# EAGLE board ESC2 (EAGLE 9.6.2)
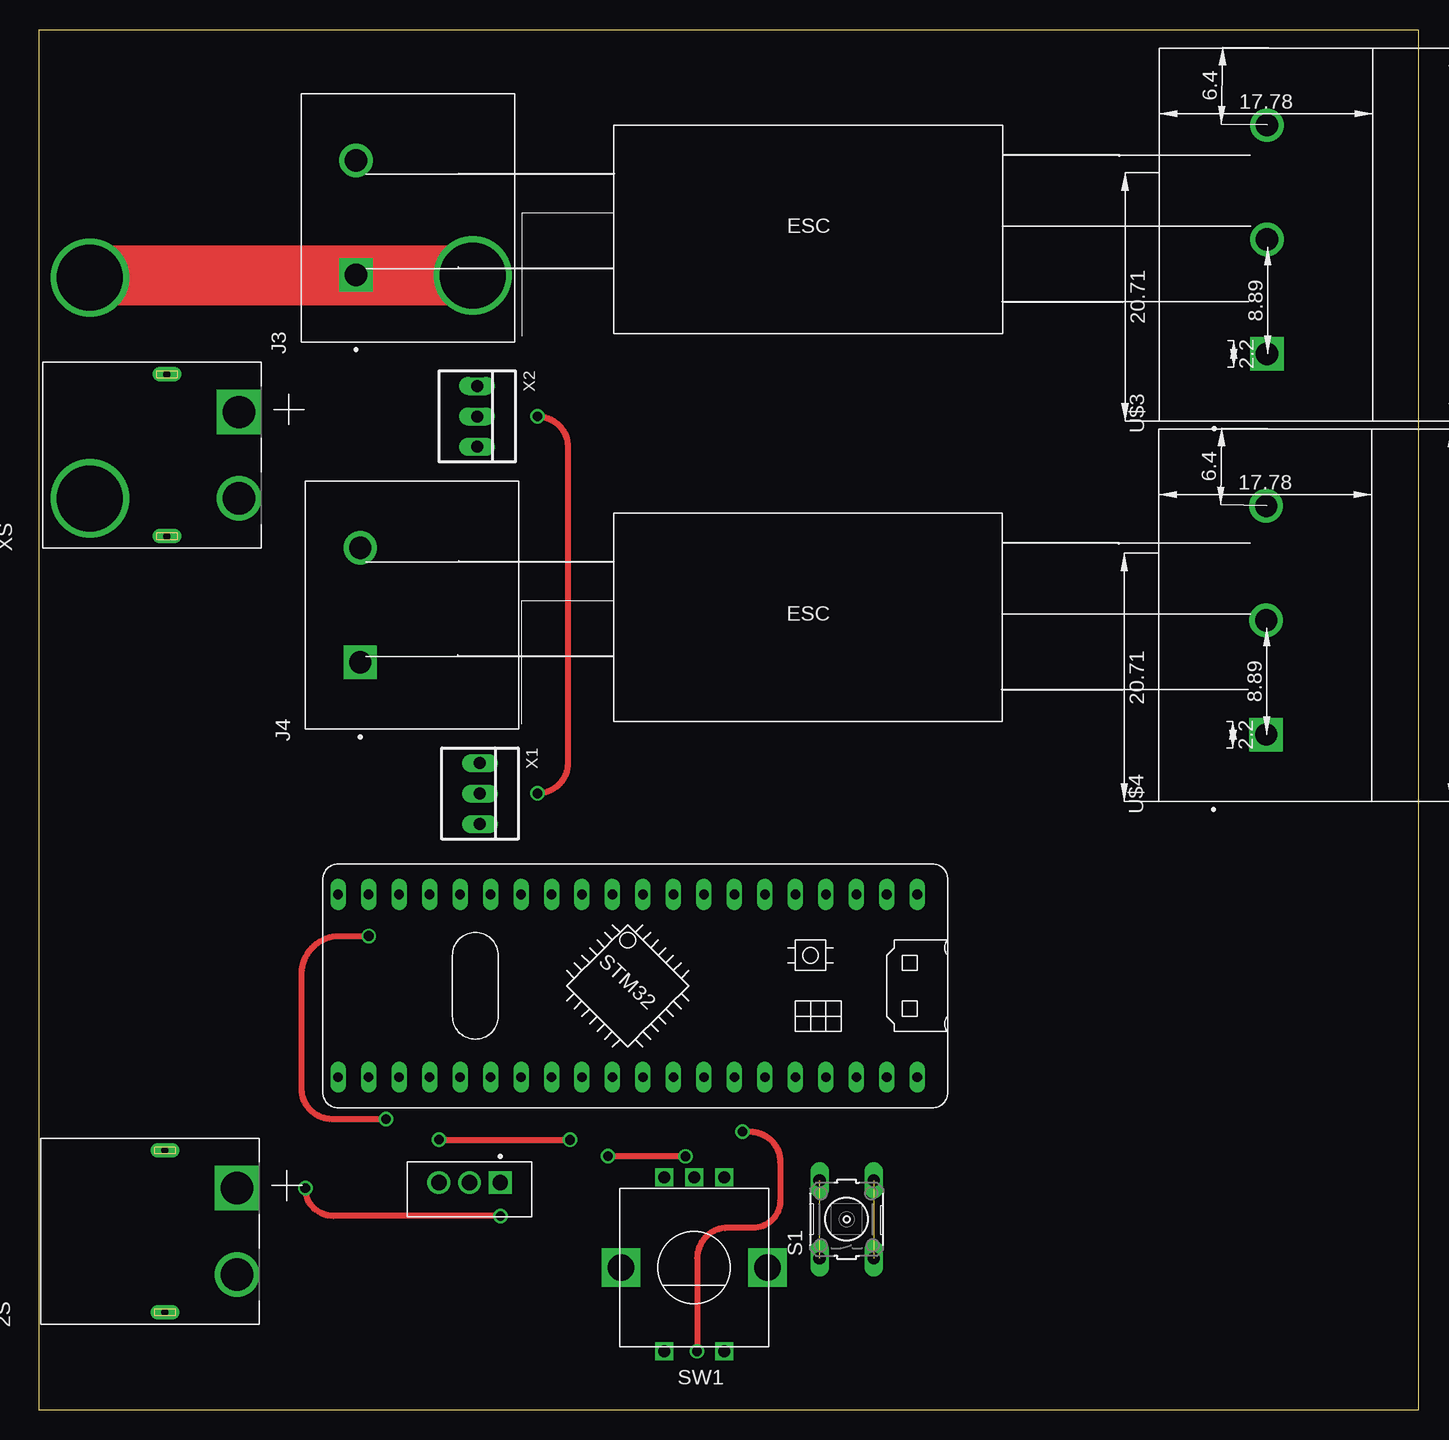
[diagram p0: board, top side]
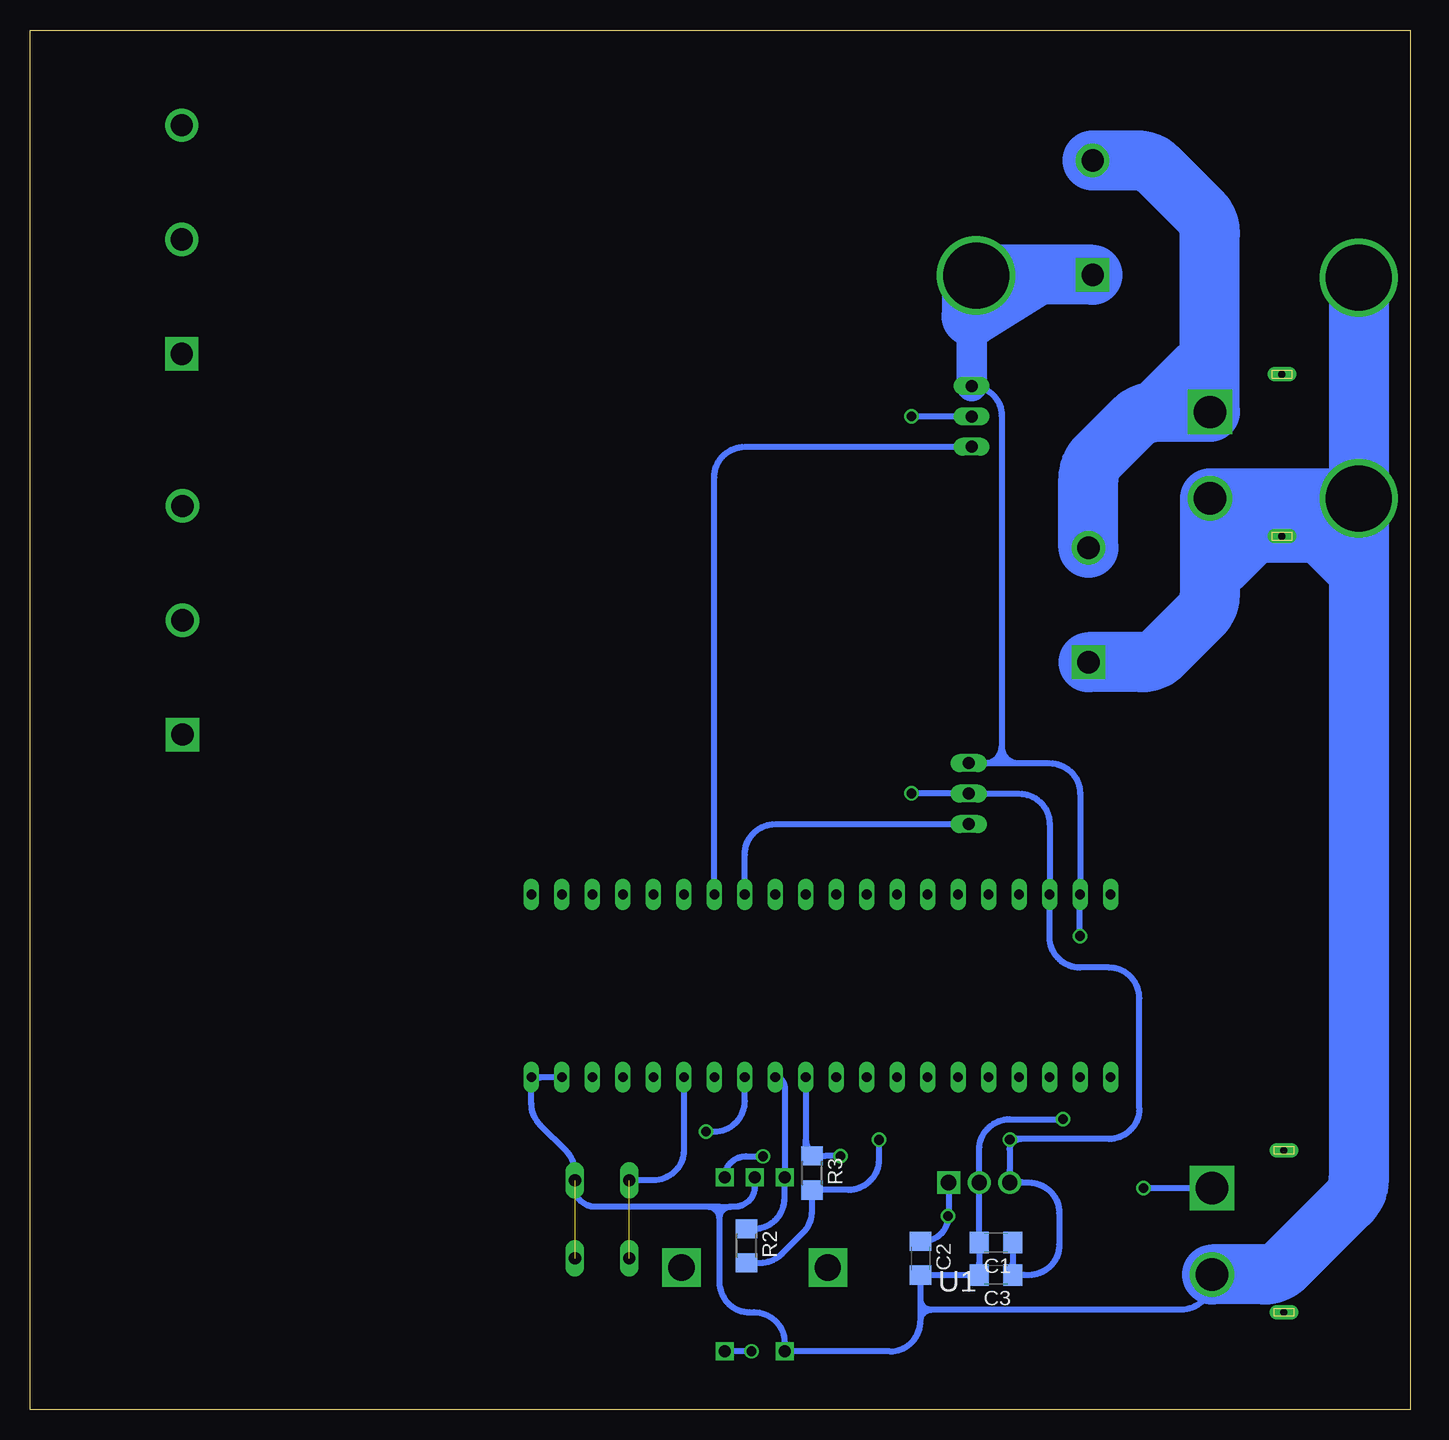
[diagram p1: board, bottom side, seen from below]

Size 115 x 115 mm. Coordinates in mm from the lower left corner, seen from the top.
Outline: 0,0 115,0 115,115 0,115 0,0
Copper layers (1*16): Top 0.035mm / dielectric 1.5mm / Bottom 0.035mm
Design rules "default": minimum track width 6mil, minimum drill 0.35mm, track to track 6mil, track to pad 6mil, pad to pad 6mil, via to via 6mil, smd to smd 6mil, copper to edge 40mil, drill to drill 6mil, minimum pad ring 10mil, minimum via ring 8mil, stop-mask expansion 4mil, vias tented up to drill 0mil, thermal gap 10mil

## Footprints (pad centres in the part's own frame; a part is rotated, then mirrored left to right if it is on the bottom)
AMASS_XT60PW-M = drill 2.7 square: 1 3.6,-6 | drill 2.7: 2 -3.6,-6 | drill 0.6 pad 1.2 long: S1 6.75,0; S2 -6.75,0
C1206 = smd 1.6 x 1.8: 1 -1.4,0; 2 1.4,0
TE_4-1437652-6 = drill 1.854 pad 2.204 square: 1 0,0 | drill 1.854 pad 2.204: 2 9.53,0
BLUE_PILL = drill 0.8 long: P$1 -7.62,15.24; P$2 -7.62,12.7; P$3 -7.62,10.16; P$4 -7.62,7.62; P$5 -7.62,5.08; P$6 -7.62,2.54; P$7 -7.62,0; P$8 -7.62,-2.54; P$9 -7.62,-5.08; P$10 -7.62,-7.62; P$11 -7.62,-10.16; P$12 -7.62,-12.7; P$13 -7.62,-15.24; P$14 -7.62,-17.78; P$15 -7.62,-20.32; P$16 -7.62,-22.86; P$17 -7.62,-25.4; P$18 -7.62,-27.94; P$19 -7.62,-30.48; P$20 -7.62,-33.02; P$21 7.62,15.24; P$22 7.62,12.7; P$23 7.62,10.16; P$24 7.62,7.62; P$25 7.62,5.08; P$26 7.62,2.54; P$27 7.62,0; P$28 7.62,-2.54; P$29 7.62,-5.08; P$30 7.62,-7.62; P$31 7.62,-10.16; P$32 7.62,-12.7; P$33 7.62,-15.24; P$34 7.62,-17.78; P$35 7.62,-20.32; P$36 7.62,-22.86; P$37 7.62,-25.4; P$38 7.62,-27.94; P$39 7.62,-30.48; P$40 7.62,-33.02
R1206 = smd 1.6 x 1.803: 1 -1.422,0; 2 1.422,0
B3F-10XX = drill 1.016 long: 1 -3.251,2.261; 2 3.251,2.261; 3 -3.251,-2.261; 4 3.251,-2.261
ALPS_EC12E_SW = drill 1 square: A -2.5,-7.5; B 2.5,-7.5; C 0,-7.5; D -2.5,7; E 2.5,7 | drill 2.2 square: GND1 -6.1,0; GND2 6.1,0
TO255P1040X460X1968-3 = drill 1.27 pad 1.91 square: 1 0,0 | drill 1.27 pad 1.91: 2 2.55,0; 3 5.1,0
3-PIN-TB = drill 1.854 pad 2.204: 2 9.53,5.138; 3 19.06,5.138 | drill 1.854 pad 2.204 square: P$2 0,5.138
22-23-2031 = drill 1 long: 1 -2.54,0; 2 0,0; 3 2.54,0

## Placement (x,y rotation side)
2S  XT60PW-M  [AMASS_XT60PW-M]  10.51,14.86 90 top
C1  [C1206]  34.49,13.9 180 bottom
C2  [C1206]  40.8,12.61 270 bottom
C3  [C1206]  34.51,11.21 180 bottom
J3  4-1437652-6  [TE_4-1437652-6]  26.45,94.58 90 top
J4  4-1437652-6  [TE_4-1437652-6]  26.79,62.3 90 top
MOD1  [BLUE_PILL]  57.97,35.32 270 top
R2  [R1206]  55.28,13.65 270 bottom
R3  [R1206]  49.83,19.72 270 bottom
S1  [B3F-10XX]  67.33,15.86 90 top
SW1  EC12E_SW  [ALPS_EC12E_SW]  54.62,11.84 180 top
U1  L7805CV  [TO255P1040X460X1968-3]  38.45,18.92 180 top
U$1  ESC_LIB  [ESC]  47.9,57.35 0 top
U$2  ESC_LIB  [ESC]  47.93,89.67 0 top
U$3  3-PIN-TB  [3-PIN-TB]  107.5,88 90 top
U$4  3-PIN-TB  [3-PIN-TB]  107.42,56.26 90 top
X1  22-23-2031  [22-23-2031]  36.77,51.34 270 top
X2  22-23-2031  [22-23-2031]  36.54,82.79 270 top
XS  XT60PW-M  [AMASS_XT60PW-M]  10.68,79.55 90 top

## Library data of the parts
2S XS = XT60PW-M; AVAILABILITY: Not in stock; CHECK_PRICES: https://www.snapeda.com/parts/XT60PW-M/AMASS/view-part/?ref=eda; DESCRIPTION: Socket, DC supply, male, PIN: 2; MF: AMASS; MP: XT60PW-M; PACKAGE: Package; PRICE: None; SNAPEDA_LINK: https://www.snapeda.com/parts/XT60PW-M/AMASS/view-part/?ref=snap
C1-C3 = rcl; SPICEPREFIX: C
J3 J4 = Terminal-Block-4-1437652-6; AVAILABILITY: In Stock; CHECK_PRICES: https://www.snapeda.com/parts/4-1437652-6/TE+Connectivity+%252F+AMP/view-part/?ref=eda; COMMENT: 4-1437652-6; DESCRIPTION: Conn Terminal Block 2 POS 9.53mm Solder ST Thru-Hole 25A/Contact; EU_ROHS_COMPLIANCE: Compliant; MF: TE Connectivity / AMP; MP: 4-1437652-6; PACKAGE: None; PRICE: None; PURCHASE-URL: https://www.snapeda.com/api/url_track_click_mouser/?unipart_id=2382815&manufacturer=TE Connectivity / AMP&part_name=4-1437652-6&search_term=terminal block 9.53mm; SNAPEDA_LINK: https://www.snapeda.com/parts/4-1437652-6/TE+Connectivity+%252F+AMP/view-part/?ref=snap
MOD1 = BluePill
R2 R3 = rcl; SPICEPREFIX: R
S1 = switch-omron; MPN: B3F-1000; OC_FARNELL: 176432; OC_NEWARK: 36M3542
SW1 = switch-alps; MPN: EC12E2424407; OC_FARNELL: 1520813; OC_NEWARK: 74M1068
U1 = L7805CV; AVAILABILITY: In Stock; CHECK_PRICES: https://www.snapeda.com/parts/L7805CV/STMicroelectronics/view-part/?ref=eda; DESCRIPTION: Linear Voltage Regulator IC Positive Fixed 1 Output 1.5A TO-220; MF: STMicroelectronics; MP: L7805CV; PACKAGE: TO-220-3 STMicroelectronics; PRICE: None; PURCHASE-URL: https://www.snapeda.com/api/url_track_click_mouser/?unipart_id=501150&manufacturer=STMicroelectronics&part_name=L7805CV&search_term=l7805; SNAPEDA_LINK: https://www.snapeda.com/parts/L7805CV/STMicroelectronics/view-part/?ref=snap
U$1 U$2 = ESC
U$3 U$4 = Terminal-Block-4-1437652-6
X1 X2 = con-molex; MF: MOLEX; MPN: 22-23-2031; OC_FARNELL: 1462950; OC_NEWARK: 30C0862

## Nets
2S: 2S.1 C2.1 U1.1
5V: C1.1 C3.1 MOD1.P$18 R2.2 R3.2 U1.3 X1.2 X2.2
BUTTON_RESET_PWM: MOD1.P$26 S1.1 S1.2
ENCODER_CLK&R: MOD1.P$30 R3.1 SW1.A
ENCODER_DT&R: MOD1.P$29 R2.1 SW1.B
ENCODER_RESET: MOD1.P$28 SW1.D
GND: 2S.2 C1.2 C2.2 C3.2 J3.1 J4.1 MOD1.P$19 MOD1.P$21 MOD1.P$22 S1.3 S1.4 SW1.C SW1.E U1.2 X1.1 X2.1 XS.2
PWM_MT_1: MOD1.P$8 X1.3
PWM_MT_2: MOD1.P$7 X2.3
XS: J3.2 J4.2 XS.1

## Tracks (layer width: path | path; a pad name or v marks a point on that pad's centre or on a via)
2S  (via drill 0.8)
  Top 0.508: v38.48,16.14 24.55,16.14 arc-90 v22.21,18.47
  Bottom 0.508: U1.1 38.45,16.17 arc90 v38.48,16.14 arc90 40.61,14.01 C2.1 | v22.21,18.47 16.53,18.47 arc90 2S.1
5V  (via drill 0.8)
  Top 0.508: v41.55,82.79 arc-90 44.09,80.25 44.09,53.9 arc-90 v41.55,51.36 | v33.35,22.49 44.25,22.49 arc-90 v44.26,22.48
  Bottom 0.508: 33.11,13.89 arc-90 C1.1 | 33.11,13.89 arc90 C1.1 | 49.83,17.98 R3.2 | 33.11,13.89 arc90 C1.1 | C1.1 33.09,12.22 | 33.09,12.22 33.09,11.22 arc90 C3.1 32.08,11.21 | U1.3 33.35,20.01 | v44.26,22.48 44.26,20.84 arc90 46.8,18.3 R3.2 | 32.42,22.55 25.09,22.55 arc-90 22.55,25.09 22.55,34.3 arc-90 25.09,36.84 27.49,36.84 arc90 30.03,39.38 MOD1.P$18 30.03,48.8 arc-90 32.57,51.34 X1.2 41.51,51.34 arc45 v41.55,51.36 | 32.42,22.55 33.3,22.55 arc-90 v33.35,22.49 33.35,21.62 | 33.35,21.62 33.35,20.01 arc90 33.35,20.01 | 33.35,21.62 arc90 32.42,22.55 | U1.3 | R2.2 54.15,12.23 arc-45 52.35,12.97 50.57,14.75 arc-45 49.83,16.55 R3.2 | U1.3 32.26,18.92 | 32.26,18.92 31.77,18.92 arc90 29.23,16.38 29.23,13.75 arc90 31.77,11.21 32.08,11.21 | 32.08,11.21 arc90 33.09,12.22 | 32.26,18.92 arc90 33.35,20.01 | X2.2 v41.55,82.79
BUTTON_RESET_PWM  (1 unrouted)
  Bottom 0.508: MOD1.P$26 60.51,21.65 arc90 63.05,19.11 S1.2
ENCODER_CLK&R  (via drill 0.8)
  Top 0.508: v53.91,21.11 47.46,21.11 arc-90 v47.45,21.12
  Bottom 0.508: MOD1.P$30 50.35,22.5 | 50.35,21.67 arc-90 R3.1 | SW1.A arc90 55.35,21.11 v53.91,21.11 | v47.45,21.12 arc-90 47.47,21.14 48.73,21.14 49,21.14 | 49,21.14 R3.1 | R3.1 arc90 50.35,21.67 | 50.35,21.67 50.35,22.5 | 50.35,22.5 arc-90 49,21.14
ENCODER_DT&R
  Bottom 0.508: R2.1 54.66,15.07 arc-90 52.12,17.61 52.12,18.75 SW1.B 52.12,26.92 arc-90 MOD1.P$29
ENCODER_RESET  (via drill 0.8)
  Top 0.508: v58.66,23.17 59.25,23.17 arc-90 61.79,20.63 61.79,17.41 arc-90 59.54,15.15 57.41,15.15 arc90 54.87,12.61 v54.87,4.85
  Bottom 0.508: 57.1,4.86 arc90 SW1.D arc90 57.1,4.85 v54.87,4.85 | v58.66,23.17 57.97,23.17 arc-90 55.43,25.71 MOD1.P$28
GND  (via drill 0.8, 5.5)  (1 unrouted)
  Top 0.508: v28.93,24.2 24.46,24.2 arc-90 21.92,26.74 21.92,36.31 arc-90 25.08,39.48 v27.5,39.48
  Top 5: v4.27,94.36 arc-45 4.7,94.54 v36.16,94.54
  Bottom 0.508: C3.2 arc-90 C3.2 35.91,11.77 arc-90 35.89,11.78 | C3.2 arc90 35.98,11.28 arc90 C3.2 | SW1.C 54.62,18.56 arc90 56.28,16.9 56.58,16.9 | 57.55,16.9 56.58,16.9 | 57.55,16.9 58.52,16.9 | 58.52,16.9 67.93,16.9 arc90 69.59,18.56 S1.4 69.59,19.77 arc-45 70.33,21.57 72.47,23.71 arc45 73.21,25.5 MOD1.P$21 | 57.55,16.9 57.55,15.93 | 57.55,15.93 57.55,10.63 arc-90 55.03,8.11 54.66,8.11 arc90 52.12,5.57 | 52.12,5.57 SW1.E 51.39,4.84 | C3.2 35.89,11.22 35.89,11.78 | 34.03,53.88 X1.1 35.41,53.88 arc-90 34.03,55.26 | 34.03,53.88 32.65,53.88 | 32.65,53.88 30.03,53.88 arc90 27.49,51.34 MOD1.P$19 arc-90 27.5,42.93 v27.5,39.48 | X2.1 arc90 34.03,82.82 34.03,55.26 | 34.03,53.88 34.03,55.26 | 34.03,55.26 arc-90 32.65,53.88 | 35.89,12.21 C1.2 35.89,18.72 arc-90 35.9,18.73 U1.2 35.9,21.66 arc90 33.36,24.2 v28.93,24.2 | 35.89,12.21 35.89,11.78 | 35.9,12.21 arc90 35.89,12.21 | MOD1.P$22 72.31,27.7 | 72.31,27.7 MOD1.P$21 | MOD1.P$21 73.21,26.79 arc90 72.31,27.7 | 40.8,9.2 C2.2 C3.2 arc90 C3.2 | 40.8,9.2 40.8,8.32 | 40.8,8.32 40.8,7.38 | 40.8,7.38 arc90 43.34,4.84 51.39,4.84 | 2S.2 16.51,10.86 arc90 19.05,8.32 39.86,8.32 | 39.91,8.32 40.8,8.32 | 40.8,7.38 arc90 39.86,8.32 | 39.86,8.32 39.91,8.32 | 39.91,8.32 arc90 40.8,9.2 | 57.55,15.93 arc-90 58.52,16.9 | 56.58,16.9 arc-90 57.55,15.93 | 51.39,4.84 arc90 52.12,5.57
  Bottom 2.54: X2.1 36.54,91.14 36.54,93.4 arc45 36.05,94.58
  Bottom 5: J4.1 22.37,62.3 arc-45 20.57,63.04 17.43,66.19 arc-45 16.68,67.98 XS.2 4.29,75.95 arc-45 v4.27,75.95 | J3.1 30.96,94.58 | 30.96,94.58 36.05,94.58 arc-45 v36.16,94.54 arc-90 36.54,94.16 36.54,91.14 30.96,94.58 | v4.27,75.95 4.27,69.83 | 4.27,69.83 4.27,19.15 arc45 5.02,17.35 10.37,12 arc45 12.17,11.26 2S.2 | 4.27,69.83 6.78,72.33 arc-45 8.58,73.08 11.92,73.08 arc-45 13.71,72.33 15.6,70.45 | v4.27,94.36 v4.27,75.95
PWM_MT_1
  Bottom 0.508: MOD1.P$8 55.43,46.26 arc90 52.89,48.8 X1.3
PWM_MT_2
  Bottom 0.508: MOD1.P$7 57.97,77.71 arc90 55.43,80.25 X2.3
XS
  Bottom 5: J4.2 26.79,77.61 arc45 26.05,79.41 23.05,82.41 arc45 21.25,83.15 | 21.25,83.15 XS.1 16.68,98.05 arc-45 17.43,99.85 20.95,103.37 arc-45 22.75,104.11 J3.2 | 21.25,83.15 arc45 21.22,83.22 17.75,86.7